# Altium PCB FC2.PcbDoc (part 1 of 2)
Units mm, origin at the board's own origin, x right, y up, seen from the top; angles counter-clockwise.
Board outline 53 x 51 mm, 4 copper layers (Top Layer, GND, PWR, Bottom Layer), stack 0.603 mm thick; 103 components, 69 nets, 505 pads, 103 vias.
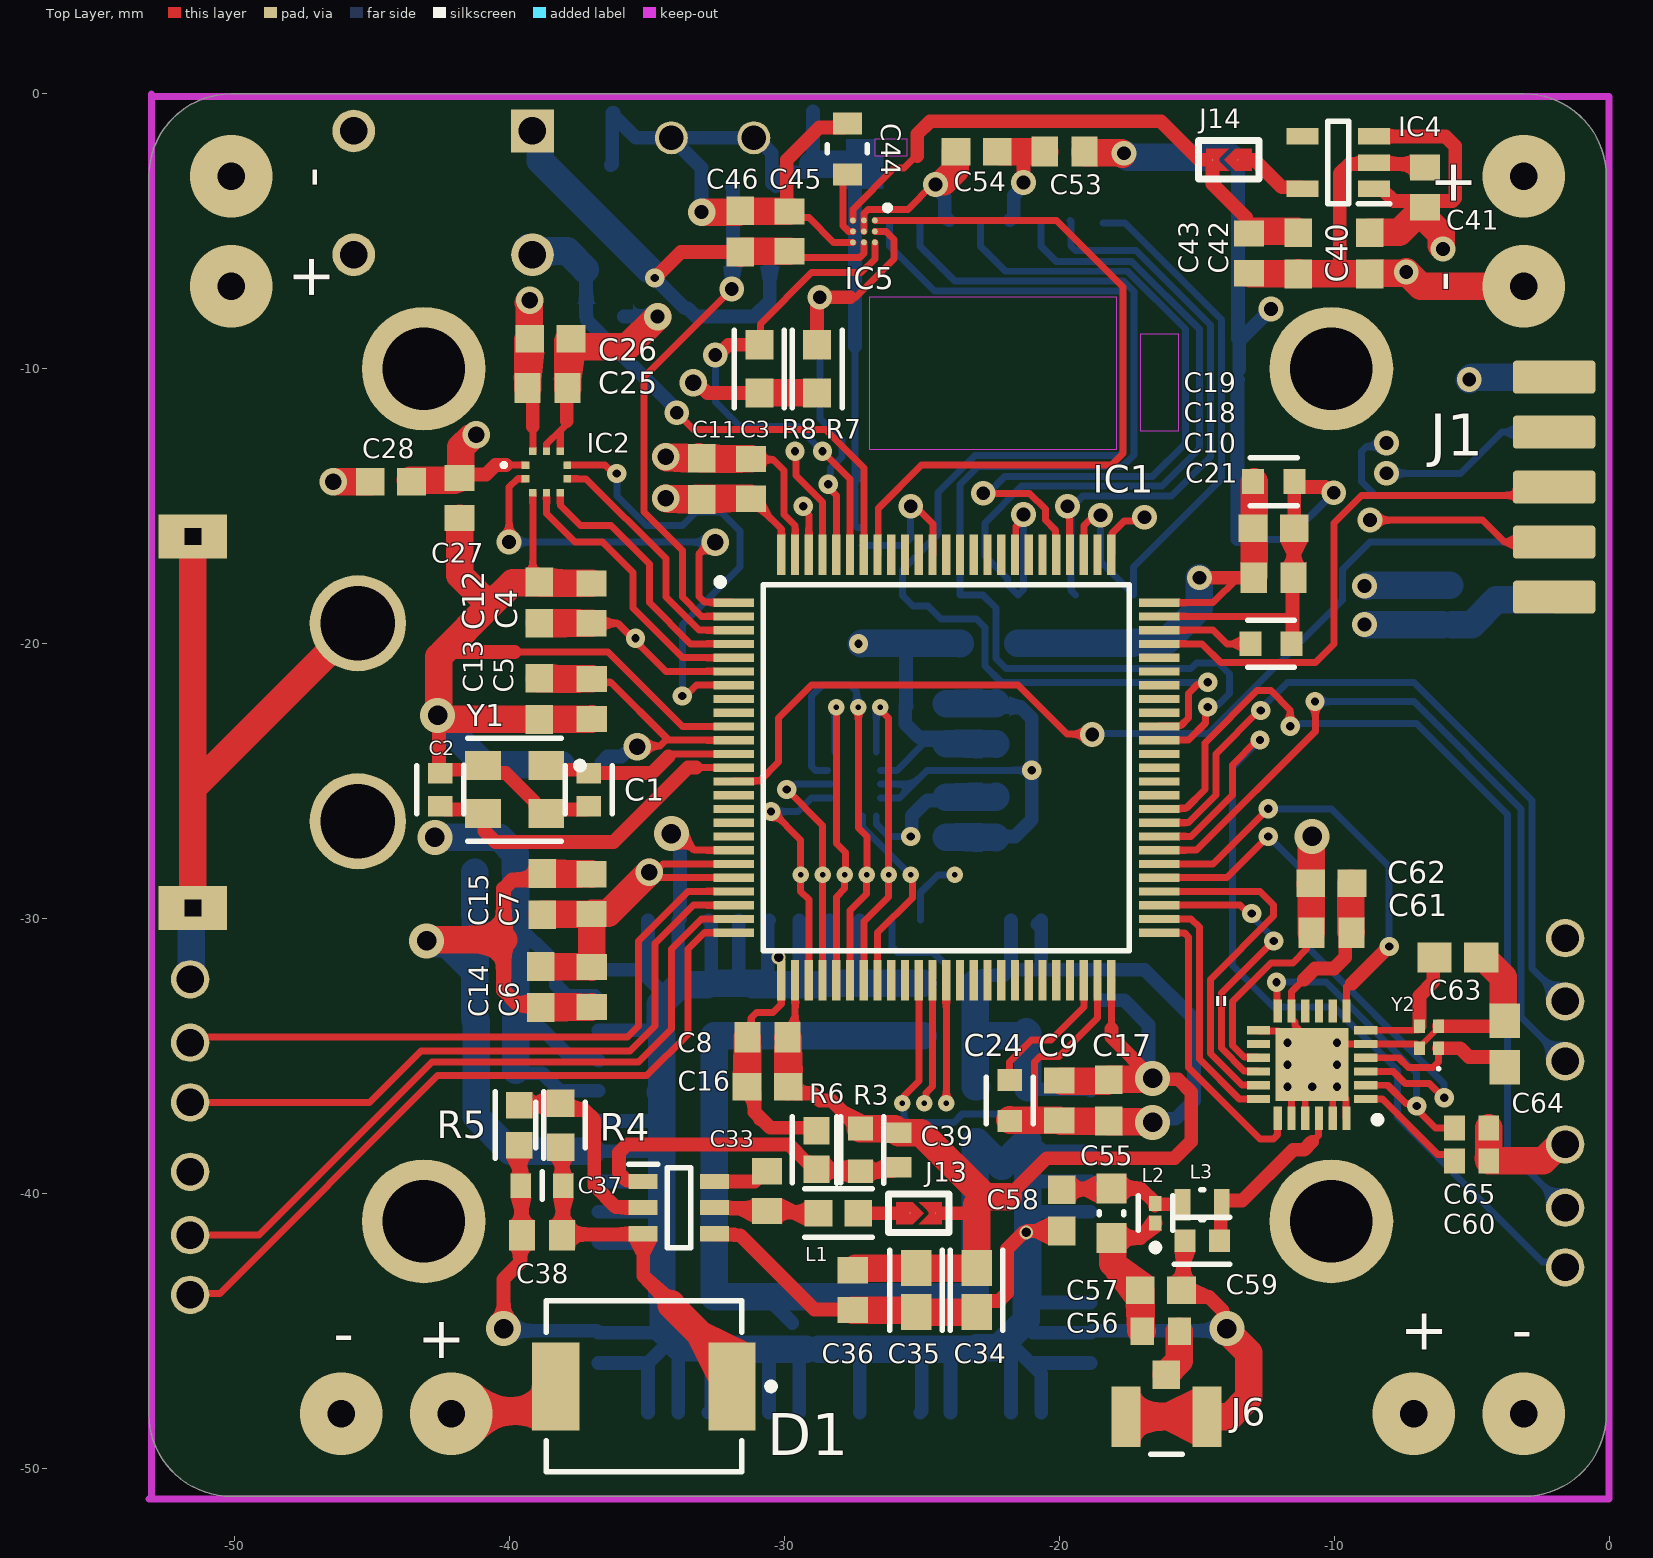
[diagram p0: Top Layer view]
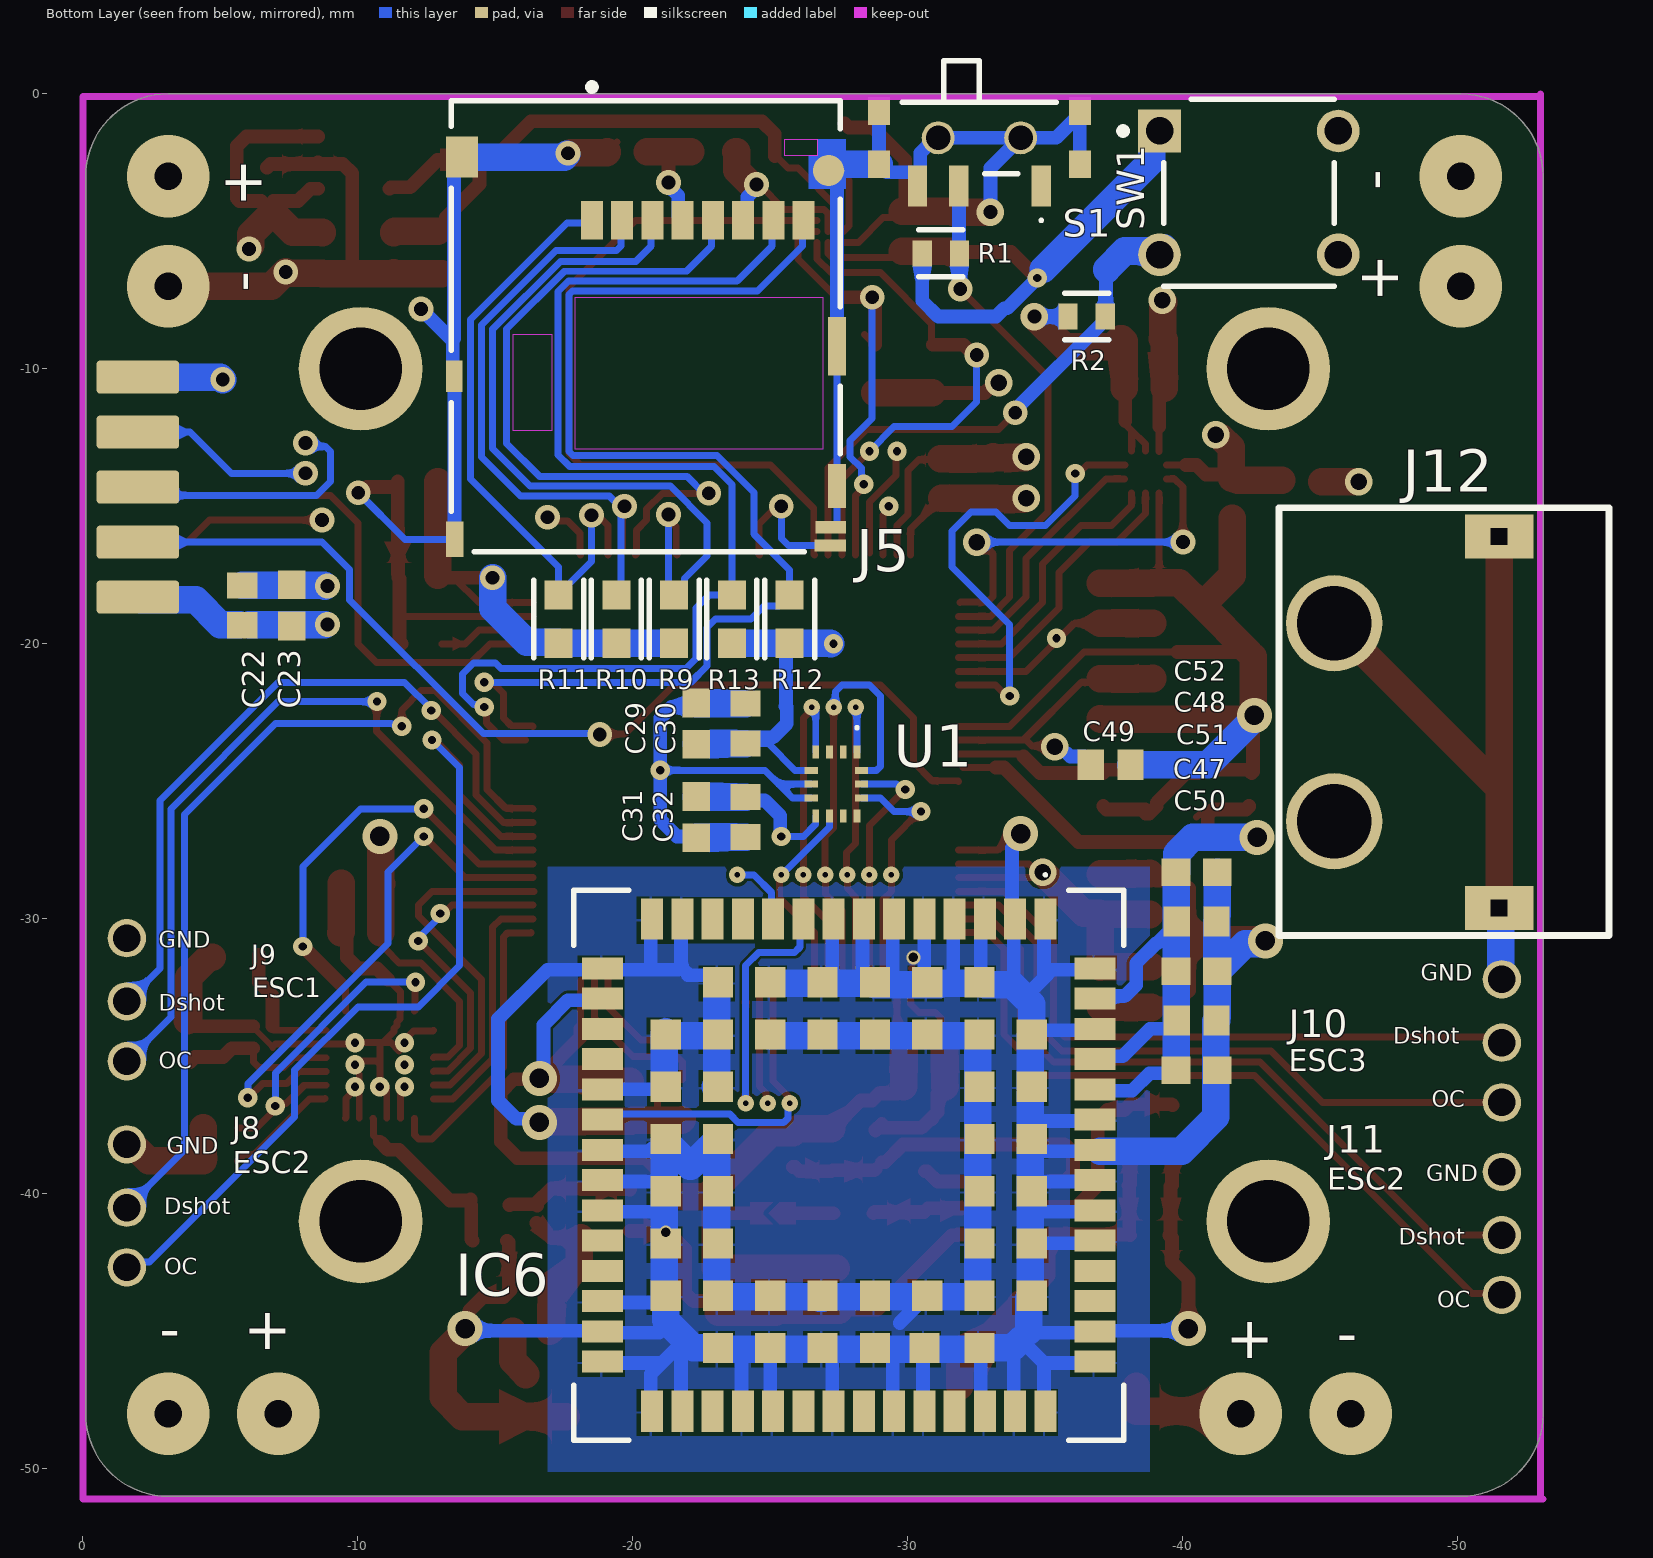
[diagram p1: Bottom Layer view, seen from below]
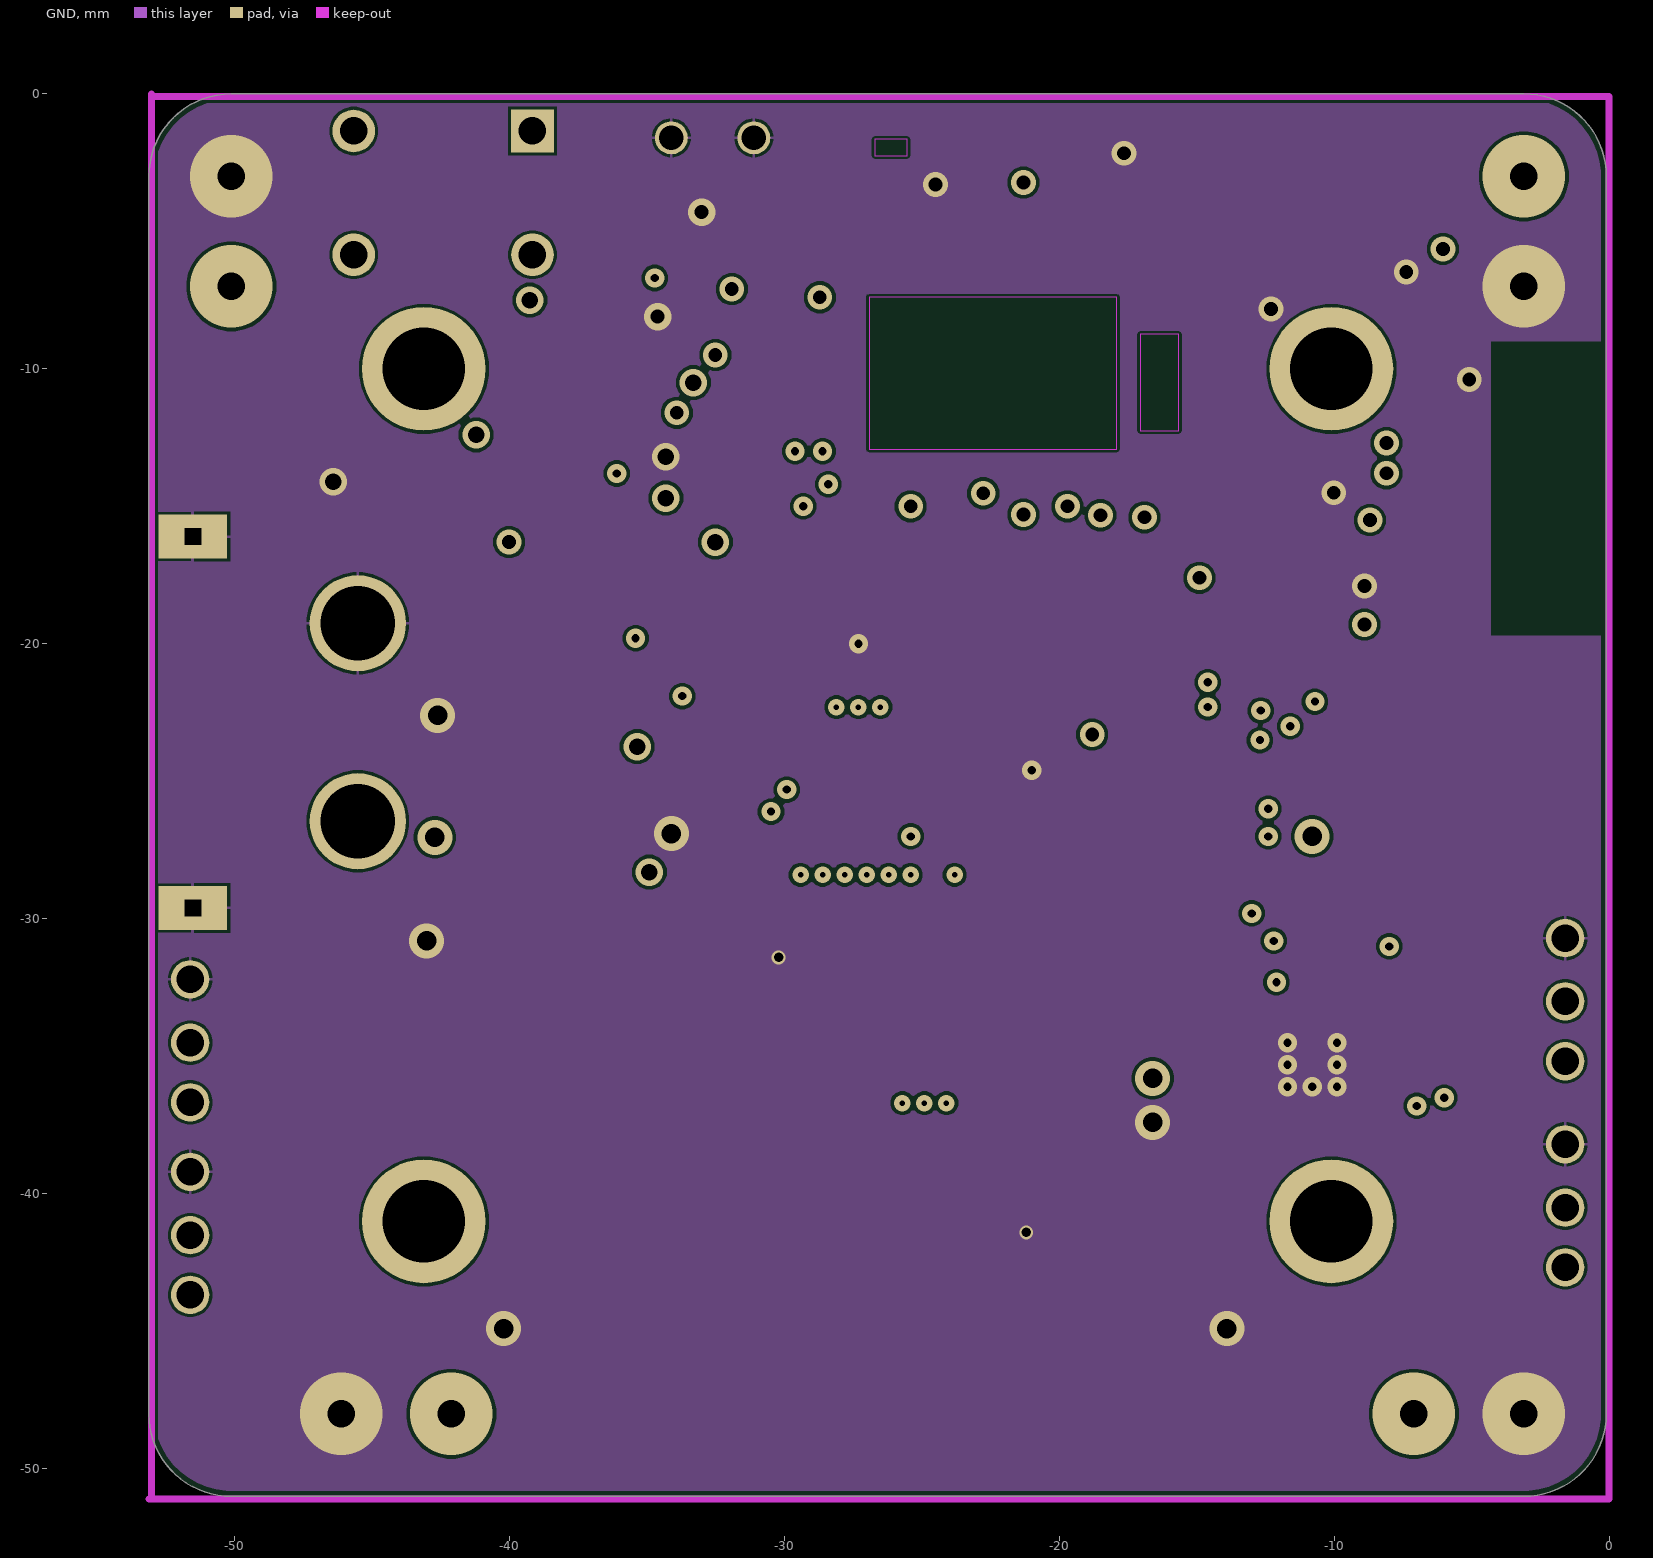
[diagram p2: GND]
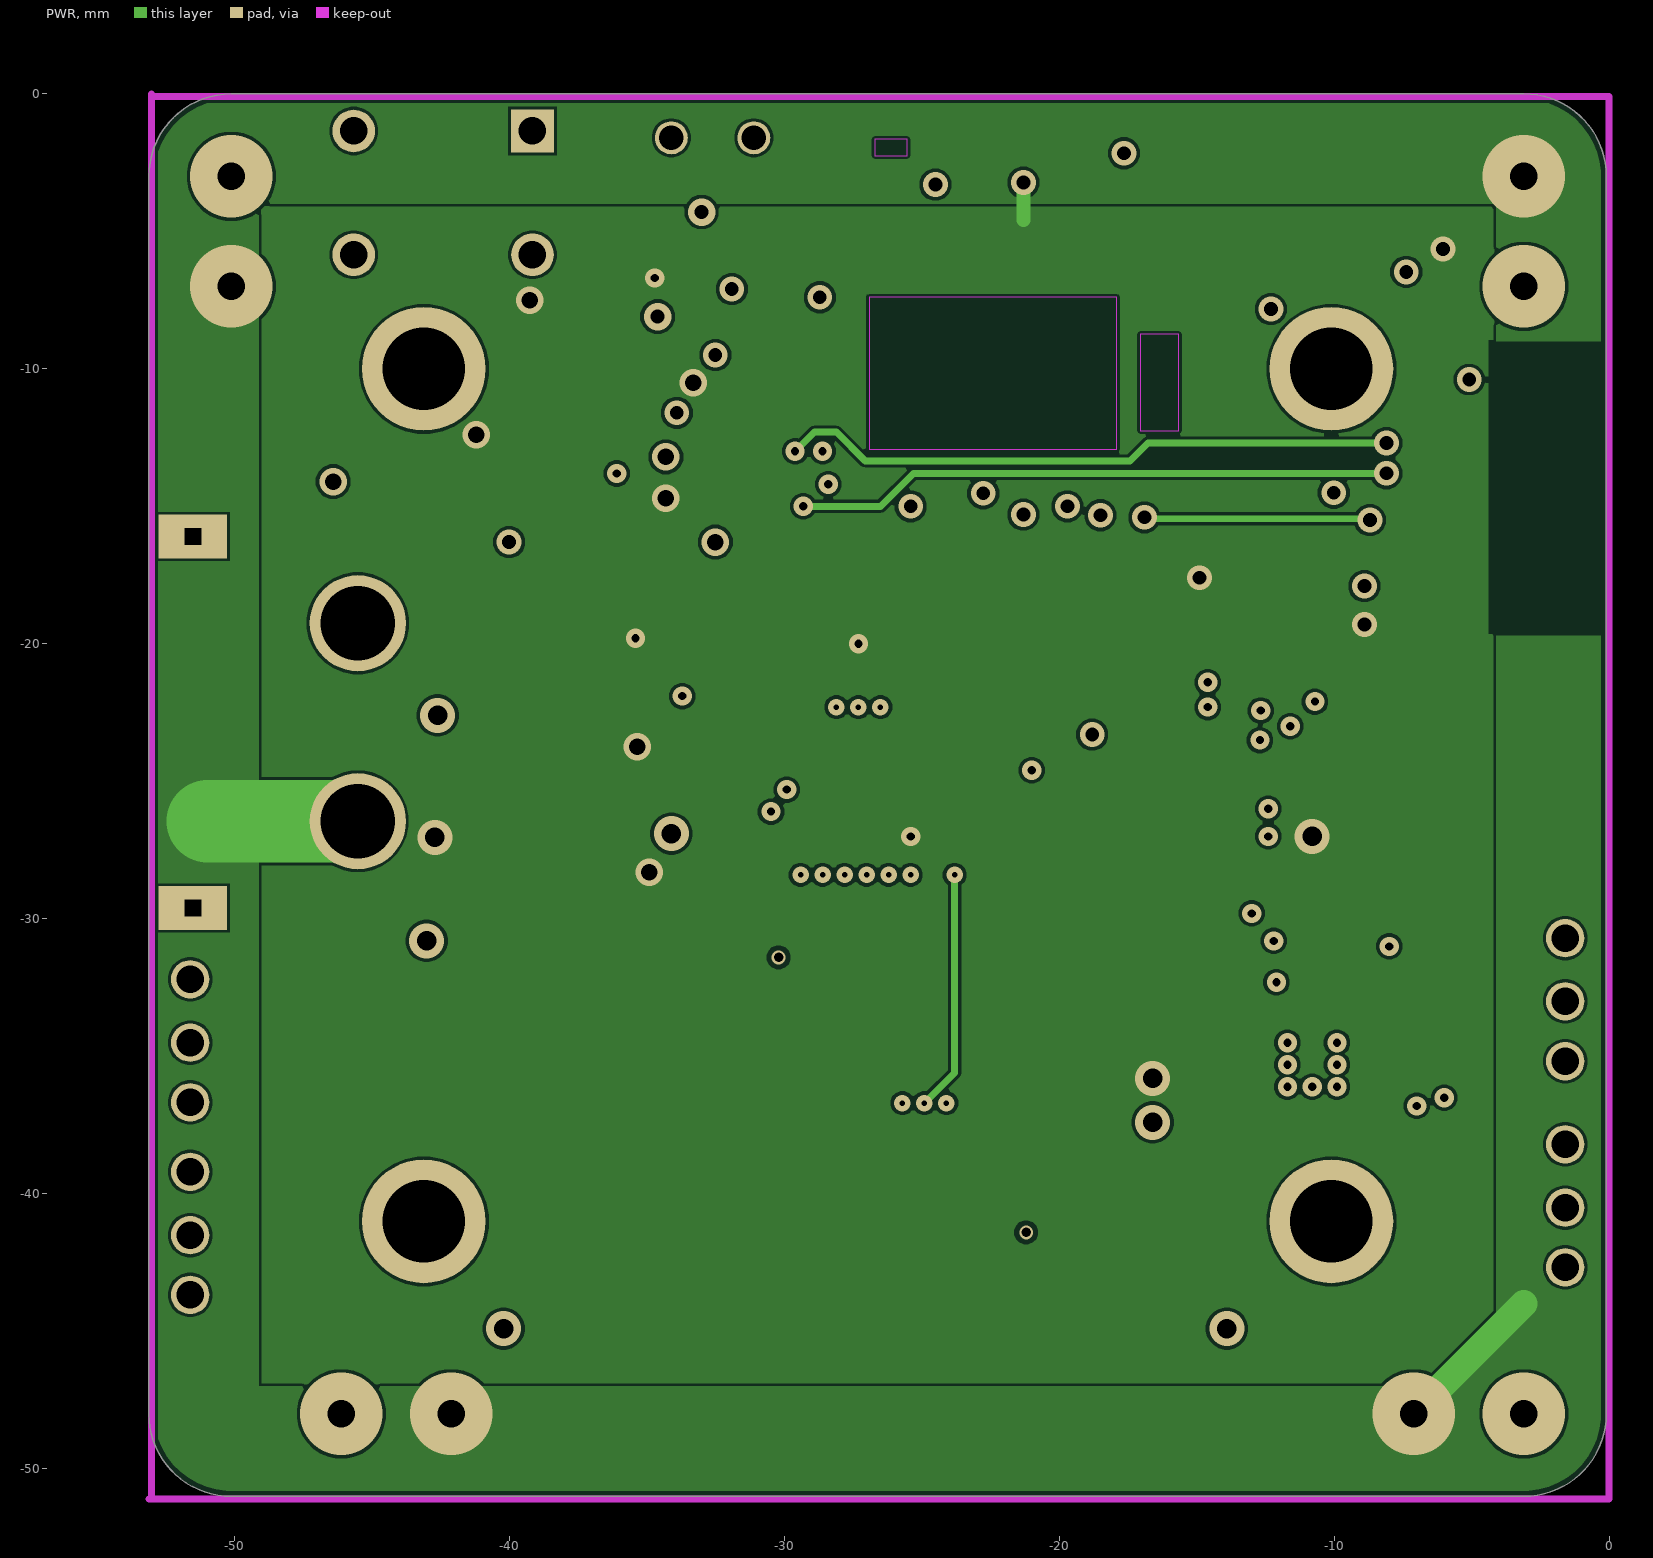
[diagram p3: PWR]

## Layer stack, top to bottom
Top Solder: solder mask 0.0102, Solder Resist, Dk 3.5
Top Layer: signal copper 0.0356
Dielectric 2: prepreg 0.0711, PP-006, Dk 4.1
GND: signal copper 0.035
Dielectric 1: dielectric 0.32, FR-4, Dk 4.8
PWR: signal copper 0.035
Dielectric 3: prepreg 0.0711, PP-006, Dk 4.1
Bottom Layer: signal copper 0.0356
Bottom Solder: solder mask 0.0102, Solder Resist, Dk 3.5

## Board outline
-53.1,-48 -53.1,-3 cw(c-50.1,-3) -50.1,0 -3.1,0 cw(c-3.1,-3) -0.1,-3 -0.1,-48.004 -0.1,-48 cw(c-3.1,-48) -3.1,-51 -50.1,-51 cw(c-50.1,-48)

## Design rules (kind name [scope] priority, off if disabled: settings)
BoardOutlineClearance [All] p1: gap=0.2 ignorepadtopadclearanceinfootprint=FALSE
Clearance [All] p1: gap=0.102 ignorepadtopadclearanceinfootprint=TRUE except(0.127: Arc-Via Track-Via SMDPad-Via THPad-Via Via-Via Via-Fill Via-Poly Via-Region Via-Text; 0.254: Arc-Hole Track-Hole SMDPad-Hole THPad-Hole Via-Hole Fill-Hole Poly-Hole Region-Hole Text-Hole)
ComponentClearance [All] p1: gap=0.102 collisioncheckmode=3 verticalgap=0.102 showdistances=TRUE
DiffPairsRouting [All] p1: maxlimit=0.127 minlimit=0.102 mostfreqgap=0.127 toplayer_minwidth=0.102 toplayer_maxwidth=1816.048 toplayer_prefwidth=0.321 midlayer1_mingap=0.127 midlayer1_minwidth=0.238 midlayer1_maxwidth=0.238 midlayer1_prefwidth=0.238 midlayer2_mingap=0.127 midlayer2_minwidth=0.238 midlayer2_maxwidth=0.238 midlayer2_prefwidth=0.238 bottomlayer_minwidth=0.102 bottomlayer_maxwidth=1816.048 bottomlayer_prefwidth=0.321 maxuncoupledlength=12.7
Height [All] p1: minheight=0 maxheight=1816.048 prefheight=12.7
HoleSize [All] p1: absolutevalues=TRUE maxlimit=6.3 minlimit=0.2 maxpercent=80.000 minpercent=20.000
HoleToHoleClearance [All] p1: gap=0.254 allowstackedmicrovias=FALSE
MinimumAnnularRing [All] p1: minimumring=0.151
MinimumSolderMaskSliver [All] p1: minsoldermaskwidth=0.09
PlaneClearance [All] p1: clearance=0.102
PlaneConnect PlaneConnectPowerPads [InPadClass('PowerPads')] p1: planeconnectstyle=Direct reliefexpansion=0.508 reliefentries=4 reliefconductorwidth=0.254 reliefairgap=0.254
PlaneConnect [All] p2: pad.planeconnectstyle=Relief pad.reliefexpansion=0.3 pad.reliefentries=4 pad.reliefconductorwidth=0.102 pad.reliefairgap=0.102 via.planeconnectstyle=Direct via.reliefexpansion=0.3 via.reliefentries=4 via.reliefconductorwidth=0.127 via.reliefairgap=0.127
PolygonConnect PolygonConnectPowerPads [All vs (InPadClass('PowerPads'))] p1: connectstyle=Direct reliefconductorwidth=0.254 reliefentries=4 polygonreliefangle="90 Angle" airgapwidth=0.254
PolygonConnect [All] p2: thpad.connectstyle=Relief thpad.reliefconductorwidth=0.102 thpad.reliefentries=4 thpad.polygonreliefangle="90 Angle" thpad.airgapwidth=0.102 smdpad.connectstyle=Relief smdpad.reliefconductorwidth=0.102 smdpad.reliefentries=4 smdpad.polygonreliefangle="90 Angle" smdpad.airgapwidth=0.102 via.connectstyle=Direct via.reliefconductorwidth=0.127 via.reliefentries=4 via.polygonreliefangle="90 Angle" via.airgapwidth=0.127
RoutingVias [All] p1: holewidth=0.2 width=0.45 viastyle="Through Hole" minholewidth=0.2 minwidth=0.45 maxholewidth=6.3 maxwidth=6.55
SilkToSilkClearance [All] p1: silktosilkclearance=0.127
SilkToSolderMaskClearance [IsPad] p1: minsilkscreentomaskgap=0.127 clearancetoexposedcopper=TRUE
SolderMaskExpansion [All] p1: expansion=0.051 istentingtop=FALSE
SupplyNets "Schematic Supply Nets_3" [InNet('BAT-')] p1: voltage=0.000
SupplyNets "Schematic Supply Nets_2" [InNet('+1.8')] p2: voltage=0.000
SupplyNets "Schematic Supply Nets_1" [InNet('VCC')] p3: voltage=0.000
SupplyNets "Schematic Supply Nets" [InNet('+3.3')] p4: voltage=0.000
UnRoutedNet [All] p1: checkbadconnections=TRUE
Width Width_PWR [All] p1: maxlimit=3 minlimit=0.12 preferedwidth=0.254
Width Width_min [All] p2: maxlimit=0.12 minlimit=0.12 preferedwidth=0.12
Width [All] p3: maxlimit=0.254 minlimit=0.254 preferedwidth=0.254
19 further rules are at their usual default settings.

## Classes and differential pairs
component class U_uController: C1 C2 C3 C4 C5 C6 C7 C8 C9 C10 C11 C12 C13 C14 C15 C16 C17 C18 C19 C21 C22 C23 C24 IC1 J1 J8 J9 J10 J11 R1 R2 S1 SW1 Y1
component class U_Sensors: C25 C26 C27 C28 C29 C30 C31 C32 IC2 U1
component class U_Power: C33 C34 C35 C36 C37 C38 C39 C40 C41 C42 C43 D1 IC4 J12 J13 J14 L1 R3 R4 R5 R6
component class U_Controller: "\"" C55 C56 C57 C58 C59 C60 C61 C62 C63 C64 C65 J6 L2 L3 Y2
component class U_Autonoom: C44 C45 C46 C47 C48 C49 C50 C51 C52 C53 C54 IC6 J5 R7 R8 R9 R10 R11 R12 R13

## Components (designator, comment, footprint, x,y, rotation, side; value= is the part's Value field where it differs from the comment)
"\"" "SX1280IMLTRT" QFN50P400X400X100-25N-D -10.8,-35.3 r180 top (schematic designator IC7)
C1 "18pF" FP-C0603C-CF-MFG -37.1,-25.3 r270 top value="18 pF"
C2 "18pF" FP-C0603C-CF-MFG -42.5,-25.3 r90 top value="18 pF"
C3 "100nF" CAPC1608X92X38ML15T08 -31.2,-14 r270 top
C4 "100nF" CAPC1608X92X38ML15T08 -37,-18.525 r270 top
C5 "100nF" CAPC1608X92X38ML15T08 -37,-22 r90 top
C6 "100nF" CAPC1608X92X38ML15T08 -37,-32.475 r90 top
C7 "100nF" CAPC1608X92X38ML15T08 -37,-29.1 r270 top
C8 "100nF" CAPC1608X92X38ML15T08 -30.601,-34.3 r0 top
C9 "100nF" CAPC1608X92X38ML15T08 -20,-36.601 r90 top
C10 "100nF" CAPC1608X92X38ML15T08 -12.199,-17.6 r180 top
C11 "1uF" CAPC1608X90X35NL15T15 -33,-14 r270 top
C12 "1uF" CAPC1608X90X35NL15T15 -38.9,-18.5 r270 top
C13 "1uF" CAPC1608X90X35NL15T15 -38.9,-22 r90 top
C14 "1uF" CAPC1608X90X35NL15T15 -38.85,-32.475 r90 top
C15 "1uF" CAPC1608X90X35NL15T15 -38.8,-29.1 r270 top
C16 "1uF" CAPC1608X90X35NL15T15 -30.6,-36.1 r0 top
C17 "1uF" CAPC1608X90X35NL15T15 -18.2,-36.6 r90 top
C18 "1uF" CAPC1608X90X35NL15T15 -12.2,-15.8 r180 top
C19 "4.7uF" FP-CC0603-DC-MFG -12.2,-14.1 r0 top
C21 "2.2uF" FP-CC0603-DA-MFG -12.3,-20 r0 top value="2.2 uF"
C22 "100nF" CAPC1608X92X38ML15T08 -5.8,-18.6 r270 bottom
C23 "1uF" CAPC1608X90X35NL15T15 -7.6,-18.6 r270 bottom
C24 "2.2uF" FP-CC0603-DA-MFG -21.8,-36.6 r270 top value="2.2 uF"
C25 "100nF" CAPC1608X92X38ML15T08 -38.6,-10.7 r180 top
C26 "1uF" CAPC1608X90X35NL15T15 -38.5,-8.9 r180 top
C27 "100nF" CAPC1608X92X38ML15T08 -41.8,-14.7 r90 top
C28 "1uF" CAPC1608X90X35NL15T15 -44.3,-14.1 r0 top
C29 "100nF" CAPC1608X92X38ML15T08 -24.1,-22.9 r270 bottom
C30 "1uF" CAPC1608X90X35NL15T15 -22.3,-22.9 r270 bottom
C31 "1uF" CAPC1608X90X35NL15T15 -22.3,-26.3 r90 bottom
C32 "100nF" CAPC1608X92X38ML15T08 -24.1,-26.3 r90 bottom
C33 "100nF" CAPC1608X92X38ML15T08 -30.625,-39.9 r90 top
C34 "22uF" FP-GRM188-0_2-IPC_A -23,-43.499 r270 top
C35 "22uF" FP-GRM188-0_2-IPC_A -25.2,-43.499 r270 top
C36 "100nF" CAPC1608X92X38ML15T08 -27.5,-43.5 r90 top
C37 "10uF" FP-ZRB18AR61E106ME01L-MFG -38.8,-39.7 r180 top
C38 "100nF" CAPC1608X92X38ML15T08 -38.8,-41.5 r0 top
C39 "100p" CAPC1608X92X38LL15T08 -25.825,-38.4 r90 top
C40 "1uF" CAPC1608X90X35NL15T15 -8.7,-5.8 r90 top
C41 "100nF" CAPC1608X92X38ML15T08 -6.7,-3.4 r90 top
C42 "1uF" CAPC1608X90X35NL15T15 -11.3,-5.8 r90 top
C43 "100nF" CAPC1608X92X38ML15T08 -13.1,-5.8 r270 top
C44 "2.2uF" FP-CGB4B-MFG -27.7,-2 r90 top
C45 "100nF" CAPC1608X92X38ML15T08 -29.8,-5 r270 top
C46 "1uF" CAPC1608X90X35NL15T15 -31.6,-5 r270 top
C47 "100nF" CAPC1608X92X38ML15T08 -40.5,-33.699 r0 bottom
C48 "100nF" CAPC1608X92X38ML15T08 -40.5,-30.099 r0 bottom
C49 "100nF" CAPC1608X92X38ML15T08 -37.375,-24.4 r0 bottom
C50 "1uF" CAPC1608X90X35NL15T15 -40.5,-35.499 r0 bottom
C51 "1uF" CAPC1608X90X35NL15T15 -40.5,-31.899 r0 bottom
C52 "1uF" CAPC1608X90X35NL15T15 -40.5,-28.299 r0 bottom
C53 "100nF" CAPC1608X92X38ML15T08 -19.8,-2.1 r180 top
C54 "1uF" CAPC1608X90X35NL15T15 -23,-2.1 r0 top
C55 "0.5pF" CAPC0603(1608)100_M -18.1,-40.7 r90 top
C56 "100pF" CAPC1608X92X38NL15T08 -16.3,-45 r180 top
C57 "1.2pF" CAPC1608X90X35NL15T15 -16.3,-43.5 r180 top
C58 "1.2pF" CAPC1608X90X35NL15T15 -19.9,-40.6 r90 top
C59 "0.8pF" FP-GCM188-0_1-IPC_C -14.8,-41.7 r180 top
C60 "10nF" CAPC1608X92X38LL15T08 -5,-38.8 r180 top
C61 "100nF" CAPC1608X92X38ML15T08 -10.1,-30.5 r180 top
C62 "1uF" CAPC1608X90X35NL15T15 -10.1,-28.7 r180 top
C63 "6pF" CAPC1608X90X35ML15T15 -5.5,-31.4 r180 top
C64 "6pF" CAPC1608X90X35ML15T15 -3.8,-34.55 r270 top
C65 "10nF" CAPC1608X92X38LL15T08 -5,-37.6 r180 top
D1 "SS34-E3/9AT" FP-SMC-MFG -35.1,-47 r180 top
IC1 "STM32F745VGT6" QFP50P1600X1600X160-100N -24.1,-24.5 r0 top
IC2 "BMP384" BMP384 -38.642,-13.75 r90 top
IC3 "AP63201WU-7" SOT95P280X100-6N -33.825,-40.5 r0 top
IC4 "AP2112K-1.8TRG1" SOT95P285X140-5N -9.85,-2.5 r180 top
IC5 "BMM350" BGA9C40P3X3_128X128X54 -27.1,-5 r270 top
IC6 "DAN-F10N-00B" DANF10N00B -27.85,-38.95 r0 bottom
J1 "STLink Connector" PCBComponent_1 -2,-14.3 r270 top
J5 "2201778-1" FP-2201778-1-MFG -22.45,-9.55 r0 bottom
J6 "U.FL-R-SMT(10)" FP-U_FL-R-SMT_10-MFG -16.1,-48.1 r0 top
J8 "Dshot, overcurrent, GND" FC-ESC_Connector -1.55,-40.5 r90 bottom
J9 "Dshot, overcurrent, GND" FC-ESC_Connector -1.55,-33 r90 bottom
J10 "Dshot, overcurrent, GND" FC-ESC_Connector -51.55,-34.5 r90 bottom
J11 "Dshot, overcurrent, GND" FC-ESC_Connector -51.55,-41.5 r90 bottom
J12 "XT60PW-M" "XT60 juist" -45.5,-22.85 r270 bottom
J13 "0603 jumper" "0603 jumper" -25.1,-40.7 r0 top
J14 "0603 jumper" "0603 jumper" -13.825,-2.4 r180 top
L1 "6.8µ" FP-MLZ1608-IPC_B -28.025,-40.7 r0 top
L2 "2.5nH" FP-LQP03TG_02-IPC_A -16.5,-40.7 r90 top
L3 "3nH" FP-LQW18AN_80-MFG -14.8,-40.4 r0 top
R1 "10k" FP-MCT0603-MFG -31.2,-5.8 r0 bottom
R2 "10k" FP-MCT0603-MFG -36.5,-8.1 r180 bottom
R3 "182k" FP-AC0603-IPC_B -27.225,-38.4 r90 top
R4 "28.7k" FP-TFCR0603-MFG -38.125,-37.5 r270 top
R5 "2.8k" FP-CRCW0603-HPe3-IPC_B -39.625,-37.5 r90 top
R6 "62k" FP-RMCF0603-IPC_B -28.825,-38.4 r270 top
R7 "4.7k" FP-AC0603-IPC_A -28.8,-10 r270 top
R8 "4.7k" FP-AC0603-IPC_A -30.9,-10 r270 top
R9 "4.7k" FP-AC0603-IPC_A -21.5,-19.1 r270 bottom
R10 "4.7k" FP-AC0603-IPC_A -19.4,-19.1 r270 bottom
R11 "4.7k" FP-AC0603-IPC_A -17.3,-19.1 r270 bottom
R12 "4.7k" FP-AC0603-IPC_A -25.7,-19.1 r270 bottom
R13 "4.7k" FP-AC0603-IPC_A -23.6,-19.1 r90 bottom
S1 "PCM12SMTBR" PCM12SMTBR -32.6,-1.6 r0 bottom
SW1 "B3W-1022" FP-B3W-1022-MFG -42.4,-3.6 r0 bottom
U1 "BMI330" BMI330 -27.4,-25.1 r270 bottom
Y1 "16MHz" FP-ABM8-MFG -39.799,-25.3 r180 top
Y2 "ABM13W-52.0000MHZ-5-B2G-T5" ABM13W -6.55,-34.3 r90 top

## Footprints (in the part's own frame and the unit in brackets; to place one, negate y for a bottom-side part, rotate by r counter-clockwise, add the part's x,y. Pads: shape width x height; smd on the part's side, far side on the other; paste and mask are expansions set on the pad)
"0603 jumper" [mil]
  round 1 smd: 1(-12.8,0) 2(23.62,0)
  Top Layer region: -32.48,-15.75 -32.48,15.75 -8.86,15.75 6.89,0 -8.86,-15.75
  Top Layer region: 15.75,0 0,-15.75 32.48,-15.75 32.48,15.75 0,15.75 8.86,6.89
  silkscreen extent -43,-28 43,28
ABM13W [mm]
  rect 0.5x0.4 smd: 1(-0.4,-0.35) 2(0.4,-0.35) 3(0.4,0.35) 4(-0.4,0.35)
  silkscreen extent -1.2,-0.4 -1.1,-0.3, body extent -0.61,-0.51 0.61,0.51, height 0.43
BGA9C40P3X3_128X128X54 [mm]
  round 0.215 smd: A1(-0.4,0.4) A2(0,0.4) A3(0.4,0.4) B1(-0.4,0) B2(0,0) B3(0.4,0) C1(-0.4,-0.4) C2(0,-0.4) C3(0.4,-0.4)
  silkscreen extent -0.96,0.76 -0.76,0.96, body extent -0.64,-0.64 0.64,0.64, height 0.5
BMI330 [mm]
  rect 0.475x0.25 smd: 1(-1.163,0.75) 2(-1.163,0.25) 3(-1.163,-0.25) 4(-1.163,-0.75) 8(1.163,-0.75) 9(1.163,-0.25) 10(1.163,0.25) 11(1.163,0.75)
  rect 0.25x0.475 smd: 5(-0.5,-0.913) 6(0,-0.913) 7(0.5,-0.913) 12(0.5,0.913) 13(0,0.913) 14(-0.5,0.913)
  silkscreen extent -2.1,0.7 -2,0.8, body extent -1.5,-1.25 1.5,1.25, height 0.84
BMP384 [mm]
  rect 0.27x0.285 smd: 1(0.25,0.758) 2(-0.25,0.758) 6(-0.25,-0.758) 7(0.25,-0.758)
  rect 0.285x0.27 smd: 3(-0.757,0.5) 4(-0.757,0) 5(-0.757,-0.5) 8(0.757,-0.5) 9(0.757,0) 10(0.757,0.5)
  silkscreen extent 0.2,1.5 0.3,1.6, body extent -1,-1 1,1, height 1
CAPC0603(1608)100_M [mm] "Chip Capacitor, Body 1.6x0.8mm, Height 1.0mm, IPC Low Density"
  rect 1.1x1.1 smd: 1(-0.9,0) 2(0.9,0)
  silkscreen extent -0.05,-0.45 0.05,0.45, body extent -0.87,-0.47 0.88,0.48, height 1
CAPC1608X90X35ML15T15 [mm] "Chip Capacitor, 2-Leads, Body 1.60x0.81mm, IPC Low Density"
  rect 1.25x1.1 smd: 1(-0.85,0) 2(0.85,0)
  body extent -0.88,-0.48 0.87,0.48, height 0.9
CAPC1608X90X35NL15T15 [mm] "Chip Capacitor, 2-Leads, Body 1.60x0.81mm, IPC Medium Density"
  rect 1.05x1 smd: 1(-0.75,0) 2(0.75,0)
  body extent -0.88,-0.48 0.87,0.48, height 0.9
CAPC1608X92X38LL15T08 [mm] "Chip Capacitor, 2-Leads, Body 1.60x0.80mm, IPC High Density"
  rect 0.75x0.9 smd: 1(-0.625,0) 2(0.625,0)
  body extent -0.87,-0.48 0.87,0.48, height 0.92
CAPC1608X92X38ML15T08 [mm] "Chip Capacitor, 2-Leads, Body 1.60x0.80mm, IPC Low Density"
  rect 0.95x1.1 smd: 1(-0.725,0) 2(0.725,0)
  body extent -0.87,-0.48 0.87,0.47, height 0.92
CAPC1608X92X38NL15T08 [mm] "Chip Capacitor, 2-Leads, Body 1.60x0.80mm, IPC Medium Density"
  rect 0.85x1 smd: 1(-0.675,0) 2(0.675,0)
  body extent -0.87,-0.48 0.87,0.47, height 0.92
DANF10N00B [mm]
  rect 0.8x1.5 smd: 1(-7.15,-8.95) 2(-6.05,-8.95) 3(-4.95,-8.95) 4(-3.85,-8.95) 5(-2.75,-8.95) 6(-1.65,-8.95) 7(-0.55,-8.95) 8(0.55,-8.95) 9(1.65,-8.95) 10(2.75,-8.95) 11(3.85,-8.95) 12(4.95,-8.95) 13(6.05,-8.95) 14(7.15,-8.95) 29(7.15,8.95) 30(6.05,8.95) 31(4.95,8.95) 32(3.85,8.95) 33(2.75,8.95) 34(1.65,8.95) 35(0.55,8.95) 36(-0.55,8.95) 37(-1.65,8.95) 38(-2.75,8.95) 39(-3.85,8.95) 40(-4.95,8.95) 41(-6.05,8.95) 42(-7.15,8.95)
  rect 1.5x0.8 smd: 15(8.95,-7.15) 16(8.95,-6.05) 17(8.95,-4.95) 18(8.95,-3.85) 19(8.95,-2.75) 20(8.95,-1.65) 21(8.95,-0.55) 22(8.95,0.55) 23(8.95,1.65) 24(8.95,2.75) 25(8.95,3.85) 26(8.95,4.95) 27(8.95,6.05) 28(8.95,7.15) 43(-8.95,7.15) 44(-8.95,6.05) 45(-8.95,4.95) 46(-8.95,3.85) 47(-8.95,2.75) 48(-8.95,1.65) 49(-8.95,0.55) 50(-8.95,-0.55) 51(-8.95,-1.65) 52(-8.95,-2.75) 53(-8.95,-3.85) 54(-8.95,-4.95) 55(-8.95,-6.05) 56(-8.95,-7.15)
  rect 1.1x1.1 smd: 57(-4.75,-6.65) 58(-2.85,-6.65) 59(-0.95,-6.65) 60(0.95,-6.65) 61(2.85,-6.65) 62(4.75,-6.65) 63(6.65,-4.75) 64(6.65,-2.85) 65(6.65,-0.95) 66(6.65,0.95) 67(6.65,2.85) 68(6.65,4.75) 69(4.75,6.65) 70(2.85,6.65) 71(0.95,6.65) 72(-0.95,6.65) 73(-2.75,6.65) 74(-4.75,6.65) 75(-6.65,4.75) 76(-6.65,2.85) 77(-6.65,0.95) 78(-6.65,-0.95) 79(-6.65,-2.85) 80(-6.65,-4.75) 81(-4.75,-4.75) 82(-2.85,-4.75) 83(-0.95,-4.75) 84(0.95,-4.75) 85(2.85,-4.75) 86(4.75,-4.75) 87(4.75,-2.85) 88(4.75,-0.95) 89(4.75,0.95) 90(4.75,2.85) 91(4.75,4.75) 92(2.85,4.75) 93(0.95,4.75) 94(-0.95,4.75) 95(-2.85,4.75) 96(-4.75,4.75) 97(-4.75,2.85) 98(-4.75,0.95) 99(-4.75,-0.95) 100(-4.75,-2.85)
  silkscreen extent -10,-10.6 10,10, body extent -9.9,-9.9 9.9,9.9, height 11.05
FC-ESC_Connector [mm]
  round 1.4 hole 1: 1(-2.175,-0.05) 2(0,-0.05) 3(2.3,-0.05)
FP-2201778-1-MFG [mm]
  rect 0.8x1.4 smd paste+0 mask+0: 1(3.94,-4.95) 2(2.84,-4.95) 3(1.74,-4.95) 4(0.64,-4.95) 5(-0.46,-4.95) 6(-1.56,-4.95) 7(-2.66,-4.95) 8(-3.76,-4.95)
  rect 1.15x0.45 smd paste+0 mask+0: 9(-4.725,6.875)
  rect 1.1x0.45 smd paste+0 mask+0: 10(-4.75,6.215)
  round 1.139 smd paste+0 mask+0: 11(-4.667,-6.761)
  rect 0.65x2.14 smd paste+0 mask+0: 12(-4.975,-0.37)
  rect 0.65x1.6 smd paste+0 mask+0: 13(-4.975,4.71)
  rect 0.65x1.3 smd paste+0 mask+0: 14(8.925,6.65)
  rect 0.6x1.15 smd paste+0 mask+0: 15(8.95,0.725)
  rect 1.16x1.5 smd paste+0 mask+0: 16(8.67,-7.25)
  Top Layer region: -5.3,-6.1 -3.95,-6.1 -3.95,-7.3 -4.25,-7.3 -4.25,-7.9 -5.3,-7.9
  Keep-Out Layer region: -4.46,3.37 4.54,3.37 4.54,-2.16 -4.46,-2.16
  Keep-Out Layer region: 5.4,2.7 6.8,2.7 6.8,-0.8 5.4,-0.8
  Keep-Out Layer region: -4.25,-7.3 -3.07,-7.3 -3.07,-7.9 -4.25,-7.9
  silkscreen extent -5.1,-9.92 9.05,7.1, body extent -5.08,-9.2 8.95,7, height 1.8
FP-ABM8-MFG [mm]
  rect 1.3x1.05 smd paste+0 mask+0: 1(-1.15,-0.875) 2(1.15,-0.875) 3(1.15,0.875) 4(-1.15,0.875)
  silkscreen extent -2.5,-1.88 1.7,1.88, body extent -1.9,-1.5 1.9,1.5, height 0.25
FP-AC0603-IPC_A [mm]
  rect 1.059x1.012 smd paste+0 mask+0: 1(-0.877,0) 2(0.877,0)
  silkscreen extent -1.41,-0.91 1.41,0.91, body extent -1.91,-1.01 1.91,1.01, height 0.25
FP-AC0603-IPC_B [mm]
  rect 0.859x0.912 smd paste+0 mask+0: 1(-0.777,0) 2(0.777,0)
  silkscreen extent -1.21,-0.86 1.21,0.86, body extent -1.46,-0.71 1.46,0.71, height 0.25
FP-B3W-1022-MFG [mm]
  rect 1.55x1.55 hole 1 paste-2539.97 mask+0: 1(3.25,-2.25)
  round 1.55 hole 1 paste-2539.97 mask+0: 2(-3.25,-2.25) 3(3.25,2.25) 4(-3.25,2.25)
  silkscreen extent -3.1,-3.4 4.7,3.4, body extent -3.85,-3.3 3.85,3.3, height 5.2
FP-C0603C-CF-MFG [mm]
  rect 0.75x0.9 smd paste+0 mask+0: 1(-0.6,0) 2(0.6,0)
  silkscreen extent -0.87,-0.85 0.88,0.85, body extent -1.2,-0.6 1.2,0.6, height 0.25
FP-CC0603-DA-MFG [mm]
  rect 0.8x0.9 smd paste+0 mask+0: 1(-0.75,0) 2(0.75,0)
  silkscreen extent -0.85,-0.85 0.85,0.85, body extent -1.35,-0.75 1.35,0.75, height 0.25
FP-CC0603-DC-MFG [mm]
  rect 0.8x0.9 smd paste+0 mask+0: 1(-0.75,0) 2(0.75,0)
  silkscreen extent -0.85,-0.87 0.85,0.87, body extent -1.43,-0.82 1.43,0.82, height 0.25
FP-CGB4B-MFG [mm]
  rect 0.8x1.05 smd paste+0 mask+0: 1(-0.925,0) 2(0.925,0)
  silkscreen extent -0.15,-0.72 0.15,0.72, body extent -1.43,-0.82 1.43,0.82, height 0.25
FP-CRCW0603-HPe3-IPC_B [mm]
  rect 0.958x0.962 smd paste+0 mask+0: 1(-0.727,0) 2(0.727,0)
  silkscreen extent -1.21,-0.88 1.21,0.88, body extent -1.46,-0.73 1.46,0.73, height 0.25
FP-GCM188-0_1-IPC_C [mm]
  rect 0.759x0.812 smd paste+0 mask+0: 1(-0.627,0) 2(0.627,0)
  silkscreen extent -1.01,-0.85 1.01,0.85, body extent -1.11,-0.55 1.11,0.55, height 0.25
FP-GRM188-0_2-IPC_A [mm]
  rect 1.305x1.106 smd paste+0 mask+0: 1(-0.801,0) 2(0.801,0)
  silkscreen extent -1.45,-0.95 1.45,0.95, body extent -1.95,-1.05 1.95,1.05, height 0.25
FP-LQP03TG_02-IPC_A [mm]
  rect 0.554x0.463 smd paste+0 mask+0: 1(-0.354,0) 2(0.354,0)
  silkscreen extent -1.37,-0.63 0.63,0.63, body extent -0.83,-0.43 0.83,0.43, height 0.25
FP-LQW18AN_80-MFG [mm]
  rect 0.57x1.15 smd paste+0 mask+0: 1(-0.715,0) 2(0.715,0)
  silkscreen extent -0.06,-0.55 0.06,0.55, body extent -1.1,-0.67 1.1,0.67, height 0.25
FP-MCT0603-MFG [mm]
  rect 0.7x0.95 smd paste+0 mask+0: 1(-0.675,0) 2(0.675,0)
  silkscreen extent -0.8,-0.85 0.8,0.85, body extent -0.77,-0.43 0.77,0.43, height 0.55
FP-MLZ1608-IPC_B [mm]
  rect 1.006x0.958 smd paste+0 mask+0: 1(-0.726,0) 2(0.726,0)
  silkscreen extent -1.23,-0.88 1.23,0.88, body extent -1.48,-0.73 1.48,0.73, height 0.25
FP-RMCF0603-IPC_B [mm]
  rect 1.006x0.958 smd paste+0 mask+0: 1(-0.701,0) 2(0.701,0)
  silkscreen extent -1.2,-0.88 1.2,0.88, body extent -1.45,-0.73 1.45,0.73, height 0.25
FP-SMC-MFG [mm]
  rect 1.72x3.2 smd paste+0 mask+0: 1(-3.205,0) 2(3.205,0)
  silkscreen extent -4.75,-3.11 3.55,3.11, body extent -4.17,-3.21 4.17,3.21, height 0.25
FP-TFCR0603-MFG [mm]
  rect 1x1 smd paste+0 mask+0: 1(-0.8,0) 2(0.8,0)
  silkscreen extent -0.82,-0.9 0.82,0.9, body extent -1.4,-0.6 1.4,0.6, height 0.25
FP-U_FL-R-SMT_10-MFG [mm]
  rect 1x1.05 smd paste-1000 mask+0: 1(0,1.525)
  rect 1.05x2.2 smd paste-1000 mask+0: 2(-1.475,0) 3(1.475,0)
  silkscreen extent -0.58,-1.38 0.58,-1.38, body extent -2.1,-1.48 2.1,2.15, height 0.25
FP-ZRB18AR61E106ME01L-MFG [mm]
  rect 0.75x0.9 smd paste+0 mask+0: 1(-0.775,0) 2(0.775,0)
  silkscreen extent 0,-0.5 0,0.5, body extent -1.25,-0.6 1.25,0.6, height 0.25
PCBComponent_1 [mm]
  rrect20% 1.2x3 smd paste+0 mask+0.1: 1(-4,0) 2(-2,0) 3(0,0) 4(2,0) 5(4,0)
  rrect20% 1.2x3 smd far side paste+0 mask+0.1: 6(-4,0) 7(-2,0) 8(0,0) 9(2,0) 10(4,0)
PCM12SMTBR [mm]
  rect 0.7x1.5 smd: 1(-2.25,1.75) 2(0.75,1.75) 3(2.25,1.75)
  round 1.2 hole 0.9 unplated: MH(-1.5,0) MH(1.5,0)
  rect 0.8x1 smd: MP(-3.65,-0.965) MP(-3.65,0.965) MP(3.65,-0.965) MP(3.65,0.965)
  silkscreen extent -2.8,-2.8 2.8,3.05, body extent -3.85,-2.83 3.85,2.17, height 1.43
QFN50P400X400X100-25N-D [mm]
  rect 0.85x0.3 smd: 1(-1.95,1.25) 2(-1.95,0.75) 3(-1.95,0.25) 4(-1.95,-0.25) 5(-1.95,-0.75) 6(-1.95,-1.25) 13(1.95,-1.25) 14(1.95,-0.75) 15(1.95,-0.25) 16(1.95,0.25) 17(1.95,0.75) 18(1.95,1.25)
  rect 0.3x0.85 smd: 7(-1.25,-1.95) 8(-0.75,-1.95) 9(-0.25,-1.95) 10(0.25,-1.95) 11(0.75,-1.95) 12(1.25,-1.95) 19(1.25,1.95) 20(0.75,1.95) 21(0.25,1.95) 22(-0.25,1.95) 23(-0.75,1.95) 24(-1.25,1.95)
  rect 2.65x2.65 smd: 25(0,0)
  silkscreen extent -2.5,1.88 -2.25,2.12, body extent -2.05,-2.05 2.05,2.05, height 1
QFP50P1600X1600X160-100N [mm]
  rect 1.475x0.3 smd: 1(-7.738,6) 2(-7.738,5.5) 3(-7.738,5) 4(-7.738,4.5) 5(-7.738,4) 6(-7.738,3.5) 7(-7.738,3) 8(-7.738,2.5) 9(-7.738,2) 10(-7.738,1.5) 11(-7.738,1) 12(-7.738,0.5) 13(-7.738,0) 14(-7.738,-0.5) 15(-7.738,-1) 16(-7.738,-1.5) 17(-7.738,-2) 18(-7.738,-2.5) 19(-7.738,-3) 20(-7.738,-3.5) 21(-7.738,-4) 22(-7.738,-4.5) 23(-7.738,-5) 24(-7.738,-5.5) 25(-7.738,-6) 51(7.738,-6) 52(7.738,-5.5) 53(7.738,-5) 54(7.738,-4.5) 55(7.738,-4) 56(7.738,-3.5) 57(7.738,-3) 58(7.738,-2.5) 59(7.738,-2) 60(7.738,-1.5) 61(7.738,-1) 62(7.738,-0.5) 63(7.738,0) 64(7.738,0.5) 65(7.738,1) 66(7.738,1.5) 67(7.738,2) 68(7.738,2.5) 69(7.738,3) 70(7.738,3.5) 71(7.738,4) 72(7.738,4.5) 73(7.738,5) 74(7.738,5.5) 75(7.738,6)
  rect 0.3x1.475 smd: 26(-6,-7.738) 27(-5.5,-7.738) 28(-5,-7.738) 29(-4.5,-7.738) 30(-4,-7.738) 31(-3.5,-7.738) 32(-3,-7.738) 33(-2.5,-7.738) 34(-2,-7.738) 35(-1.5,-7.738) 36(-1,-7.738) 37(-0.5,-7.738) 38(0,-7.738) 39(0.5,-7.738) 40(1,-7.738) 41(1.5,-7.738) 42(2,-7.738) 43(2.5,-7.738) 44(3,-7.738) 45(3.5,-7.738) 46(4,-7.738) 47(4.5,-7.738) 48(5,-7.738) 49(5.5,-7.738) 50(6,-7.738) 76(6,7.738) 77(5.5,7.738) 78(5,7.738) 79(4.5,7.738) 80(4,7.738) 81(3.5,7.738) 82(3,7.738) 83(2.5,7.738) 84(2,7.738) 85(1.5,7.738) 86(1,7.738) 87(0.5,7.738) 88(0,7.738) 89(-0.5,7.738) 90(-1,7.738) 91(-1.5,7.738) 92(-2,7.738) 93(-2.5,7.738) 94(-3,7.738) 95(-3.5,7.738) 96(-4,7.738) 97(-4.5,7.738) 98(-5,7.738) 99(-5.5,7.738) 100(-6,7.738)
  silkscreen extent -8.35,-6.65 6.65,6.87, body extent -8,-8 8,8, height 1.6
SOT95P280X100-6N [mm]
  rect 1.05x0.55 smd: 1(-1.3,0.95) 2(-1.3,0) 3(-1.3,-0.95) 4(1.3,-0.95) 5(1.3,0) 6(1.3,0.95)
  silkscreen extent -1.83,-1.45 0.43,1.58, body extent -1.4,-1.45 1.4,1.45, height 1
SOT95P285X140-5N [mm]
  rect 1.15x0.6 smd: 1(-1.3,0.95) 2(-1.3,0) 3(-1.3,-0.95) 4(1.3,-0.95) 5(1.3,0.95)
  silkscreen extent -1.88,-1.5 0.38,1.5, body extent -1.43,-1.5 1.43,1.5, height 1.4
"XT60 juist" [mm]
  round 3.5 hole 2.7: 1(3.6,0) 2(-3.6,0)
  rect 1.6x2.5 hole 0.6 square: MNT(-6.75,6) MNT(6.75,6)
  silkscreen extent -7.8,-2 7.75,10

## Part data
"\"": "Integrated Circuit", Manufacturer_Name=SEMTECH, Mouser Part Number=947-SX1280IMLTRT, Arrow Part Number=SX1280IMLTRT, Arrow Price/Stock=https://www.arrow.com/en/products/sx1280imltrt/semtech?utm_currency=USD&region=nac, Datasheet Link=https://datasheet.datasheetarchive.com/originals/distributors/DKDS-37/728740.pdf, Height=1mm, Manufacturer_Part_Number=SX1280IMLTRT, Mouser Price/Stock=https://www.mouser.co.uk/ProductDetail/Semtech/SX1280IMLTRT?qs=5aG0NVq1C4xuoq8G6ZzdxQ%3D%3D
C1 C2: library part CMP-03020-018448-1, "C0603 18 pF C0G 30ppm/°C 1.00% 50 V", Capacitance="18 pF", Manufacturer=KEMET, Manufacturer Part Number=C0603C180F5GACAUTO, Package=C0603C-CF, Temperature="-55°C to +125°C", Temperature Characteristic=C0G, Temperature Coefficient=30ppm/°C, Temperature Range High=+125°C, Temperature Range Low=-55°C, Tolerance=0.01, Voltage Rating="50 V", Automotive=Yes, Automotive Grade="Grade 1", Category=Cap, ComponentLink2Description=Datasheet, ComponentLink2URL=https://api.kemet.com/component-edge/download/datasheet/C0603C100J5GACAUTO.pdf, Device Class L1="Passive Components", Device Class L2=Capacitors, Device Class L3="Ceramic Capacitors", Height=0.87mm, Lead Free=Yes, Material=Ceramic, Octopart=https://octopart.com/c0603c180f5gacauto-kemet-91893831, RoHS=TRUE
C3 C4 C5 C6 C7 C8 C9 C10 C22 C25 C27 C29 C32 C33 C36 C38 C41 C43 C45 C47 C48 C49 C53 C61: library part CMP-2006-01140-1, Manufacturer=Vitramon, Part Number=VJ0603Y104MXXAC
C11 C12 C13 C14 C15 C16 C17 C18 C23 C26 C28 C30 C31 C40 C42 C46 C50 C51 C52 C54 C62: library part CMP-2006-04534-1, Manufacturer="AVX Interconnect / Elco", Part Number=0603YD105MAT2A
C19: library part CMP-03422-001038-2, "CAP CER 4.7UF 6.3V X7R 0603", Case Code (Imperial)=0603, Case Code (Metric)=1608, Max Operating Temperature=125°C, Min Operating Temperature=-55°C, Tolerance=20%, Voltage Rating=6.3V, Capacitance=4.7uF, Case/Package=0603, Mount="Surface Mount", Packaging="Cut Tape", RoHS Compliant=Yes
C21 C24: library part CMP-03422-000187-1, "CC0603 2.2 uF X5R 10.00% 16 V", Capacitance="2.2 uF", Manufacturer=YAGEO, Manufacturer Part Number=CC0603KPX5R7BB225, Package=CC0603-DA, Temperature="-55°C to +125°C", Temperature Characteristic=X5R, Temperature Coefficient=15%, Temperature Range High=+125°C, Temperature Range Low=-55°C, Tolerance=0.1, Voltage="16 V", Automotive=No, Category=Cap, ComponentLink2Description=Datasheet, ComponentLink2URL=http://www.yageo.com/documents/recent/UPY-GPHC_X7R_6.3V-to-50V_18.pdf, Device Class L1="Passive Components", Device Class L2=Capacitors, Device Class L3="Ceramic Capacitors", Footprint Url=http://www.yageo.com/exep/pages/download/literatures/UPY-C_GEN_24.pdf, Height=0.9mm, Lead Free=Yes, Material=Ceramic, Octopart=https://octopart.com/cc0603kpx5r7bb225-yageo-91091799, RoHS=TRUE, Voltage Rating="16 V"
C34 C35: library part CMP-06035-063651-1, "Multilayer Ceramic Capacitor 22uF 20% 16V X5R 0603 Paper T/R"
C37: library part CMP-06035-062385-2, "CAP CER 10UF 25V X5R 0603", Case Code (Imperial)=0603, Case Code (Metric)=1608, Dielectric=X5R, Max Operating Temperature=85°C, Min Operating Temperature=-55°C, Tolerance=20%, Voltage=25V, Capacitance=10uF, Case/Package=0603, Depth=0.8mm, Height=1mm, Length=0.063inch, Mount="Surface Mount", Packaging="Cut Tape", REACH SVHC="No SVHC", RoHS Compliant=Yes, Thickness=0.047inch, Voltage Rating=25V, Voltage Rating (DC)=25V, Width=0.031inch
C39: library part CMP-2006-01182-1, Manufacturer=Vitramon, Part Number=VJ0603A101FXAAC
C44: library part CMP-08246-003816-1, "Multilayer Ceramic Capacitors 2.2uF ±10% 6.3V X7R SMD 0805, type: CGB4B3X7R0J225K055AB", Case Code (Imperial)=0805, Case Code (Metric)=2012, Max Operating Temperature=125°C, Min Operating Temperature=-55°C, Package Quantity=4000, Tolerance=10%, Voltage Rating=6.3V, Capacitance=2.2uF, Case/Package=0805, Length=0.079inch, Mount="Surface Mount", Packaging="Tape and Reel", RoHS Compliant=Yes, Series=CGB, Thickness=0.022inch, Width=0.049inch
C55: library part CMP-1035-00001-1, "CAP 0.5pF 10V ±0.1pF 0603 (1608 Metric) Thickness 1mm SMD", Case-EIA=0603, Case-Metric=1608, Rated Voltage="10 V", Tolerance=Â±0.1pF, Max Thickness="1 mm", Technology=SMT
C56: library part CMP-2006-01145-1, Manufacturer=Vitramon, Part Number=VJ0603A101KXCAC
C57 C58: library part CMP-2006-04009-1, Manufacturer="AVX Interconnect / Elco", Part Number=06031A1R2CAT2A
C59: library part CMP-06035-009191-1, "Ceramic Capacitor for Automotive 0.8pF  ±0.1pF 100VDC C0G 0603 Paper T/R"
C60 C65: library part CMP-2006-01201-1, Manufacturer=Vitramon, Part Number=VJ0603Y103JXXAC
C63 C64: library part CMP-2006-04052-1, Manufacturer="AVX Interconnect / Elco", Part Number=06031A5R0CAT2A
D1: library part CMP-02539-000066-1, "DIODE SCHOTTKY 40V 3A DO214AB", Average Rectified Current=3A, Case/Package=SMC, Forward Voltage=500mV, Max Operating Temperature=125°C, Max Repetitive Reverse Voltage (Vrrm)=40V, Max Reverse Current=500uA, Max Surge Current=100A, Min Operating Temperature=-55°C, Package Quantity=3500, Element Configuration=Single, Forward Current=3A, Max Reverse Leakage Current=500uA, Max Reverse Voltage (DC)=40V, Mount="Surface Mount", Number of Pins=2, Packaging="Tape and Reel", Peak Non-Repetitive Surge Current=100A, Radiation Hardening=No, RoHS Compliant=Yes, Series=-
IC1: "Integrated Circuit", Manufacturer_Name=STMicroelectronics, Mouser Part Number=511-STM32F745VGT6, Arrow Part Number=STM32F745VGT6, Arrow Price/Stock=https://www.arrow.com/en/products/stm32f745vgt6/stmicroelectronics, Datasheet Link=https://www.st.com/resource/en/datasheet/stm32f745ie.pdf, Height=1.6mm, Manufacturer_Part_Number=STM32F745VGT6, Mouser Price/Stock=https://www.mouser.co.uk/ProductDetail/STMicroelectronics/STM32F745VGT6?qs=k5OWtXsTJapN7FnaCvUsAA%3D%3D
IC2: "Integrated Circuit", Manufacturer_Name=BOSCH, Mouser Part Number=262-BMP384, Arrow Part Number=BMP384, Arrow Price/Stock=https://www.arrow.com/en/products/bmp384/bosch-sensortec?utm_currency=USD&region=nac, Datasheet Link=https://www.mouser.in/datasheet/2/783/bst_bmp384_ds003-1954011.pdf, Height=1mm, Manufacturer_Part_Number=BMP384, Mouser Price/Stock=https://www.mouser.co.uk/ProductDetail/Bosch-Sensortec/BMP384?qs=IS%252B4QmGtzzqB3KCclqIEVQ%3D%3D
IC3: "Integrated Circuit", Manufacturer_Name="Diodes Incorporated", Mouser Part Number=621-AP63201WU-7, Arrow Part Number=AP63201WU-7, Arrow Price/Stock=https://www.arrow.com/en/products/ap63201wu-7/diodes-incorporated?utm_currency=USD&region=nac, Datasheet Link=https://www.diodes.com//assets/Datasheets/AP63200-AP63201-AP63203-AP63205.pdf, Height=1mm, Manufacturer_Part_Number=AP63201WU-7, Mouser Price/Stock=https://www.mouser.co.uk/ProductDetail/Diodes-Incorporated/AP63201WU-7?qs=u16ybLDytRaVD%252BU3eG30NA%3D%3D
IC4: "Integrated Circuit", Manufacturer_Name="Diodes Incorporated", Mouser Part Number=621-AP2112K-1.8TRG1, Arrow Part Number=AP2112K-1.8TRG1, Arrow Price/Stock=https://www.arrow.com/en/products/ap2112k-1.8trg1/diodes-incorporated?utm_currency=USD&region=nac, Datasheet Link=https://www.diodes.com//assets/Datasheets/AP2112.pdf, Height=1.4mm, Manufacturer_Part_Number=AP2112K-1.8TRG1, Mouser Price/Stock=https://www.mouser.co.uk/ProductDetail/Diodes-Incorporated/AP2112K-1.8TRG1?qs=x6A8l6qLYDBx1xhw8AX2cw%3D%3D
IC5: "Integrated Circuit", Manufacturer_Name=BOSCH, Mouser Part Number=262-BMM350, Arrow Part Number=BMM350, Arrow Price/Stock=https://www.arrow.com/en/products/bmm350/bosch-sensortec?utm_currency=USD&region=nac, Datasheet Link=https://www.bosch-sensortec.com/media/boschsensortec/downloads/datasheets/bst-bmm350-ds001.pdf, Height=0.54mm, Manufacturer_Part_Number=BMM350, Mouser Price/Stock=https://www.mouser.co.uk/ProductDetail/Bosch-Sensortec/BMM350?qs=amGC7iS6iy9v98dnmxozLQ%3D%3D
IC6: "Integrated Circuit", Manufacturer_Name=u-blox, Datasheet Link=https://content.u-blox.com/sites/default/files/documents/DAN-F10N_DataSheet_UBXDOC-963802114-13074.pdf, Height=12.4mm, Manufacturer_Part_Number=DAN-F10N-00B
J5: library part CMP-03356-000002-1, "MICRO SD PUSH PUSH LOW PROFILE T", Current Rating=0.5A, Manufacturer="TE Connectivity", Package=0, Temperature="-30°C to +85°C", Temperature Range High=+85°C, Temperature Range Low=-30°C, Voltage Rating=10V, Automotive=No, Category=Conn, ComponentLink2Description=Datasheet, ComponentLink2URL=https://www.te.com/commerce/DocumentDelivery/DDEController?Action=showdoc&DocId=Specification+Or+Standard%7F108-78951%7FA%7Fpdf%7FEnglish%7FENG_SS_108-78951_A.pdf%7F2201778-1, Conn Orientation="Right Angle", Contact Material=Gold,Nickel, Device Class L1=Connectors, Device Class L2="Memory Connectors", Device Class L3=unset, Digikey Description="MICRO SD PUSH PUSH LOW PROFILE T", Footprint Url=https://www.te.com/commerce/DocumentDelivery/DDEController?Action=showdoc&DocId=Customer+Drawing%7F2201778%7FC%7Fpdf%7FEnglish%7FENG_CD_2201778_C.pdf%7F2201778-1, Height=1.75mm, Is Female=yes, Lead Free=Yes, Manufacturer Part Number=2201778-1, Memory Type=SDRAM, Mouser Description="CONNECTOR, MICROSD, PUSH PUSH - REEL; Connector Type: Micro SD; Contact Material:", Number Of Contacts=8, Octopart=https://octopart.com/2201778-1-te+connectivity-46448999, Pitch=1.1mm, RoHS=TRUE
J6: library part CMP-0029-00003-2, "CONN U.FL RCPT STR 50 OHM SMD", Case/Package=SMD/SMT, Dielectric Material=Polymer, Frequency=6GHz, Housing Color=Beige, Max Operating Temperature=90°C, Min Operating Temperature=-40°C, Package Quantity=1, Body Material=Bronze, Body Plating=Silver, Connector Type=Coaxial, Contact Material=Brass, Contact Plating=Gold, Depth=3.1mm, Fastening Type=Snap, Impedance=50R, Lead Free="Lead Free", Length=3mm, Max Frequency=6GHz, Mount="Surface Mount", Orientation=Vertical, Packaging="Tape and Reel", Plating=Silver, Radiation Hardening=No, Termination=Solder
L1: library part CMP-08253-000236-1, "Shielded Multilayer Inductor 6.8uH ±20% 300mA 962mΩ SMD 0603", RoHS Compliant=Yes
L2: library part CMP-06042-004686-1, "Film type RF Inductor 2.5nH ±0.1nH 500mA 0.2Ω 0201 (0603)", Case Code (Imperial)=0201, Case Code (Metric)=0603, Current Rating=500mA, DC Resistance (DCR)=200mR, Max Operating Temperature=125°C, Min Operating Temperature=-55°C, Package Quantity=15000, Resistor Type="Thin Film", Self Resonant Frequency=10GHz, Test Frequency=500MHz, Case/Package=0201, Core Material=Non-Magnetic, Height=0.3mm, Height - Seated (Max)=0.013inch, Inductance=2.5nH, Lead Free="Lead Free", Length=0.024inch, Max DC Current=500mA, Mount="Surface Mount", Packaging="Tape and Reel", Q Factor=14, Shielding=Unshielded, Termination=SMD/SMT, Width=0.012inch
L3: library part CMP-06042-001485-1, "Wire Wound RF Inductor 3nH ±0.2nH 670mA 0.17Ω 0603 (1608)", Case Code (Imperial)=0603, Case Code (Metric)=1608, Current Rating=670mA, DC Resistance (DCR)=170mR, Max Operating Temperature=125°C, Min Operating Temperature=-55°C, Package Quantity=4000, Resistor Type=Wirewound, Self Resonant Frequency=15GHz, Test Frequency=100MHz, Case/Package=0603, Core Material=Non-Magnetic, Height=0.9mm, Height - Seated (Max)=0.039inch, Inductance=3nH, Length=0.065inch, Max DC Current=670mA, Mount="Surface Mount", Packaging="Tape and Reel", Q Factor=13, Shielding=Unshielded, Termination=SMD/SMT, Weight=7.1E-05oz, Width=0.99mm
R1 R2: library part CMP-02407-002367-1, "RES SMD 100 OHM 1% 1/8W 0603", Case/Package=0603, Max Operating Temperature=125°C, Max Power Dissipation=100mW, Min Operating Temperature=-55°C, Package Quantity=1000, Resistance=10kR, Temperature Coefficient=15ppm/°C, Tolerance=0.1%, Composition="Thin Film", Height=0.022inch, Length=0.061inch, Number of Terminations=2, Packaging="Tape and Reel", Width=0.033inch
R3: library part CMP-03412-027023-2, "RES 182KΩ 1.00% 0.1W 0603", Case/Package=0603, Max Operating Temperature=155°C, Max Power Dissipation=100mW, Min Operating Temperature=-55°C, Resistance=182kR, Resistor Type="Thick Film", Temperature Coefficient=100ppm/°C, Tolerance=1%, Features="Moisture Resistant", Height=0.022inch, Length=0.063inch, Number of Terminations=2, Packaging="Tape and Reel", RoHS Compliant=Yes, Series=AC, Width=0.031inch
R4: library part CMP-250906-245084-1, "RES Thin Film,  28.7kΩ, 0.1%, 0.1W, 25ppm/°C, 0603"
R5: library part CMP-02407-011340-1, "RES Thick Film, 2.8kΩ, 1%, 0.33W, 100ppm/°C, 0603", Case Code (Imperial)=0603, Case Code (Metric)=1608, Max Operating Temperature=155°C, Max Power Dissipation=250mW, Min Operating Temperature=-55°C, Package Quantity=10, Resistance=2.8kR, Resistor Type="Thick Film", Temperature Coefficient=100ppm/°C, Tolerance=1%, Case/Package=0603, Contact Plating=Tin, Features="Automotive AEC-Q200", Height=0.022inch, Lead Free="Lead Free", Length=0.063inch, Mount="Surface Mount", Number of Terminations=2, Packaging="Tape and Reel", Power Rating=250mW, Radiation Hardening=No, RoHS Compliant=Yes, Series=CRCW-HP, Width=0.033inch
R6: library part CMP-26527-001234-1, "62kΩ ±5% 0.1W 0603 Thick Film Chip Resistor AEC-Q200 compliant", Case Code (Imperial)=0603, Case Code (Metric)=1608, Max Operating Temperature=155°C, Max Power Dissipation=100mW, Min Operating Temperature=-55°C, Package Quantity=5000, Resistance=62kR, Resistor Type="Thick Film", Temperature Coefficient=200ppm/°C, Tolerance=5%, Case/Package=0603, Contact Plating=Tin, Features="Automotive AEC-Q200", Height=0.022inch, Lead Free="Lead Free", Length=0.061inch, Mount="Surface Mount", Number of Terminations=2, Packaging="Tape and Reel", Power Rating=100mW, Radiation Hardening=No, RoHS Compliant=Yes, Series=RMCF, Size Code=0603, Width=0.031inch
R7 R8 R9 R10 R11 R12 R13: library part CMP-03412-006483-2, "RES 4.7KΩ 1.00% 0.1W 0603", Case/Package=0603, Resistance=4.7kR, Tolerance=1%, RoHS Compliant=Yes
SW1: library part CMP-08834-000055-1, "SWITCH TACTILE SPST-NO 0.05A 24V", Max Operating Temperature=70°C, Min Operating Temperature=-25°C, Operating Force=230gf, Ratings=IP67, Actuator Type=Standard, Illumination Type=Non-Illuminated, Mechanical Life=1000000Cycles, Mount="Through Hole", Packaging=Bulk, RoHS Compliant=Yes, Switch Function=Off-Mom, Switch Travel=0.25mm, Termination="PC Pin", Throw Configuration=SPST
U1: "Undefined or Miscellaneous", Manufacturer_Name=BOSCH, Arrow Part Number=BMI330, Arrow Price/Stock=https://www.arrow.com/en/products/bmi330/bosch-sensortec?utm_currency=USD&region=nac, Datasheet Link=https://www.digikey.ph/en/products/detail/bosch-sensortec/BMI330/26795906?msockid=3bdc366bbe0663d83c1223c0bf3662a6, Height=0.87mm, Manufacturer_Part_Number=BMI330
Y1: library part CMP-27762-003067-1, "Crystal 16MHz ±20ppm 18pF SMD-4 3.2mm x 2.5mm                      ABM8-16.000MHZ-B2-T3", Case/Package=SMD/SMT, ESR (Equivalent Series Resistance)=70R, Frequency Stability=50ppm, Frequency Tolerance=20ppm, Load Capacitance=18pF, Max Operating Temperature=70°C, Min Operating Temperature=-20°C, Frequency=16MHz, Height=0.031inch, Length=0.126inch, Mount="Surface Mount", Packaging="Tape and Reel", RoHS Compliant=Yes, Series=ABM8, Width=0.098inch
Y2: "Crystal or Oscillator", Manufacturer_Name=ABRACON, Mouser Part Number=815-13W52-5-B2GT, Arrow Part Number=ABM13W-52.0000MHZ-5-B2G-T5, Arrow Price/Stock=https://www.arrow.com/en/products/abm13w-52.0000mhz-5-b2g-t5/abracon, Datasheet Link=https://abracon.com/datasheets/ABM13W.pdf, Height=0.33mm, Manufacturer_Part_Number=ABM13W-52.0000MHZ-5-B2G-T5, Mouser Price/Stock=https://www.mouser.co.uk/ProductDetail/ABRACON/ABM13W-520000MHZ-5-B2G-T5?qs=qSfuJ%252Bfl%2Fd5s5ep7evyC%2Fg%3D%3D

## Free pads (board coordinates)
  round 4.5 hole 3 unplated: "MNT PCB"(-43.1,-10) "MNT PCB"(-43.1,-41) "MNT PCB"(-10.1,-41) "MNT PCB"(-10.1,-10)

## Via types
v1: diameter 0.7, hole 0.3, Top Layer to Bottom Layer, 34 vias
v2: diameter 0.9, hole 0.5, Top Layer to Bottom Layer, 26 vias
v3: diameter 0.6, hole 0.2, Top Layer to Bottom Layer, 13 vias
v4: diameter 1.27, hole 0.711, Top Layer to Bottom Layer, 9 vias
v5: diameter 1, hole 0.6, Top Layer to Bottom Layer, 9 vias
v6: diameter 3, hole 1, Top Layer to Bottom Layer, 8 vias
v7: diameter 0.5, hole 0.35, Top Layer to Bottom Layer, 2 vias
v8: diameter 1, hole 0.5, Top Layer to Bottom Layer, 2 vias

## Nets (pads, with @x,y where several pads share a name; then routed paths per layer and width w, separated by ;. In a path a pad name is that pad's centre, name@x,y a point inside that pad or via, vN(x,y) a via of type N, cw(c..) or ccw(c..) an arc to the next point about the centre after c; other vN are vias at no path point)
+1.8: C42.2 C43.1 IC5.C1 J14.2 | length 20.4
  Top Layer w0.254: IC5.C1@-27.5,-4.6 -27.5,-4.2 -26,-2.7 -25.637,-2.7 -25.2,-2.263 -25.158,-2.263
  Top Layer w0.5: -25.158,-2.263 -25.158,-1.458 -24.7,-1 -16.3,-1 -14.9,-2.4 -14.7,-2.4 J14.2@-14.425,-2.4 -14.425,-3.275 -13.2,-4.5 C43.1@-13.2,-4.8
  Top Layer w1: C43.1@-12.9,-5 -11.35,-5 -11.325,-5.025 -11.3,-5.025 C42.2@-11.3,-5.05
+3.3: "\".15" C3.2 C4.2 C5.2 C6.2 C7.2 C8.2 C9.2 C10.2 C11.2 C12.2 C13.2 C14.2 C15.2 C16.2 C17.2 C18.2 C19.1 C22.2 C23.2 C25.2 C26.2 C27.2 C28.2 C29.2 C30.2 C31.2 C32.2 C34.1 C35.1 C36.2 C39.2 C40.2 C41.1 C45.2 C46.2 C47.2 C48.2 C49.2 C50.2 C51.2 C52.2 C53.2 C54.2 C61.2 C62.2 IC1.6 IC1.11 IC1.20 IC1.21 IC1.27 IC1.50 IC1.75 IC1.100 IC2.1 IC2.10 IC4.1 IC4.3 IC5.B3 IC6.16 IC6.52 IC6.53 IC6.55 J1.10 J5.4 J13.2 R1.2 R3.2 R7.2 R8.2 R9.2 R10.2 R11.2 R12.2 R13.1 SW1.1 U1.5 U1.8 | length 213.8
  Top Layer w0.254: -40.1,-13.5 IC2.1@-39.4,-13.5 ; IC2.10@-39.137,-12.996 -39.137,-12.1 ; C6.2@-37,-31.75 C6.2@-36.767,-31.518 ; C5.2@-37,-21.275 -36.875,-21.4 -36.3,-21.4 -34.25,-23.45 ; C4.2@-37,-19.25 -36.05,-19.25 -34.3,-21 IC1.6@-31.838,-21 ; v5(-35.345,-23.738) -35.32,-23.714 -34.514,-23.714 -34.3,-23.5 ; v5(-34.9,-28.3) v5@-34.698,-28.3 ; -34.2,-23.5 IC1.11@-31.838,-23.5 ; IC1.21@-31.838,-28.5 -34.498,-28.5 v5@-34.698,-28.3 ; IC1.20@-31.838,-28 -34.398,-28 v5@-34.698,-28.3 ; C3.2@-31.2,-14.725 -31.125,-14.725 -30.777,-15.073 -30.777,-15.148 -30.1,-15.825 IC1.100@-30.1,-16.762 ; C8.2@-29.876,-34.325 -29.6,-34.05 IC1.27@-29.6,-32.238 ; C45.2@-29.749,-5.949 -27.249,-5.949 -27.1,-5.8 IC5.B3@-27.1,-5.4 ; -18.1,-34 IC1.50@-18.1,-32.238 ; IC1.75@-16.362,-18.5 -14.4,-18.5 -13.5,-17.6 ; -12.75,-35.05 -12.773,-35.027 -13.27,-35.027 -13.7,-34.597 -13.7,-33 -12.3,-31.6 -11.5,-31.6 -11,-31.1 C61.2@-11,-30.5
  Top Layer w0.5: C27.2@-41.75,-13.925 -41.67,-13.845 -40.845,-13.845 -40.5,-13.5 -40.1,-13.5 ; v5@-41.35,-12.55 v5(-41.2,-12.4) ; C25.2@-39.3,-10.9 -39.237,-10.9 -39.137,-11 -39.137,-12.1 ; v1(-34.7,-6.7) -33.75,-5.75 C46.2@-31.6,-5.75 ; v5@-33.2,-10.6 -33.196,-10.596 -33.069,-10.596 -32.788,-10.877 R8.2@-30.9,-10.877 ; J13.2@-24.5,-40.7 -23.4,-40.7 -22.75,-40.05 -22.7,-40 ; -21.85,-40.1 -20.45,-38.7 -15.8,-38.7 -15.2,-38.1 -15.2,-36.3 -15.671,-35.829 v4@-16.471,-35.829 ; v2(-21.3,-3.225) -21.3,-2.5 C53.2@-20.9,-2.1 ; -18.1,-34 -18.1,-34.3 v4(-16.6,-35.8) ; v2@-14.8,-17.6 C10.2@-12.924,-17.6 ; IC4.1@-8.55,-3.45 -8.275,-3.45 -7.825,-3.9 C41.1@-6.925,-3.9 ; IC4.3@-8.55,-1.55 -5.95,-1.55 -5.6,-1.9 -5.6,-3.8 -5.7,-3.9 C41.1@-6.475,-3.9
  Top Layer w0.51: C16.2@-29.85,-36.1 -29.605,-36.345 -28.955,-36.345 -28.7,-36.6 -28.275,-36.6 -27.252,-37.623 R3.2@-27.225,-37.623
  Top Layer w1: C28.2@-43.6,-14.05 C27.2@-42,-14.05 ; C27.2@-41.825,-14 C27.2@-41.8,-13.975 -41.775,-13.975 -41.75,-13.95 -41.75,-13.925 -41.75,-12.85 v5@-41.4,-12.5 ; C25.2@-39.325,-10.7 -39.325,-8.95 C26.2@-39.275,-8.9 ; v5@-39.3,-7.6 -39.275,-7.625 C26.2@-39.275,-8.9 ; C26.2@-39.25,-8.9 C26.2@-39.275,-8.9 ; C13.2@-38.9,-21.25 -38.9,-21.275 C5.2@-37,-21.275 ; C12.2@-38.9,-19.25 C4.2@-37,-19.25 ; C14.2@-38.85,-31.725 -38.85,-31.738 -37.012,-31.738 C6.2@-37,-31.75 C7.2@-37,-30 ; C15.2@-38.8,-29.85 -38.8,-29.837 C7.2@-37.1,-29.837 ; C7.2@-37,-29.825 -36.975,-29.8 -36.4,-29.8 v5(-34.9,-28.3) ; v5(-34.3,-14.7) -34.275,-14.725 C11.2@-33.2,-14.725 ; C11.2@-33.2,-14.7 C3.2@-31.225,-14.7 ; C46.2@-31.6,-5.8 -31.525,-5.725 C45.2@-29.8,-5.725 ; R8.2@-30.894,-10.877 R7.2@-28.8,-10.877 ; C8.2@-29.876,-34.325 -29.85,-34.351 C16.2@-29.85,-36.1 ; C36.2@-27.4,-42.7 -27.399,-42.699 C35.1@-25.2,-42.699 ; R3.2@-27.225,-37.623 -25.977,-37.623 C39.2@-25.825,-37.775 -25.025,-37.775 -22.75,-40.05 -22.7,-40.1 ; C35.1@-25.199,-42.699 C34.1@-23,-42.699 -23,-40.4 -22.7,-40.1 ; C54.2@-22.1,-2.1 C53.2@-20.525,-2.1 ; -21.85,-40.1 -22.7,-40.1 ; C9.2@-19.9,-35.9 -18.25,-35.9 -18.225,-35.875 -18.2,-35.875 C17.2@-18.2,-35.85 -18.2,-35.825 v4@-16.6,-35.825 ; C10.2@-12.9,-17.5 C19.1@-12.9,-14.1 ; C62.2@-10.875,-28.725 -10.825,-28.775 C61.2@-10.825,-30.5 ; C62.2@-10.85,-28.7 -10.825,-28.7 -10.825,-27.025 v4(-10.8,-27) ; C40.2@-8.7,-5.05 -8.7,-5.025 -7.625,-5.025 -6.9,-4.3 -6.1,-5.1 v2@-6.1,-5.5
  PWR w0.5: -21.3,-4.6 v2(-21.3,-3.225)
  Bottom Layer w0.254: -35.786,-23.977 -35.509,-23.7 v5@-35.4,-23.7 ; U1.8@-26.65,-26.263 -26.65,-26.55 -26.2,-27 v1@-25.5,-27 ; U1.5@-26.487,-24.6 -25.9,-24.6 -24.925,-23.625 C29.2@-24.1,-23.625 ; R12.2@-25.7,-20.1 R12.2@-25.7,-19.977
  Bottom Layer w0.5: C50.2@-39.75,-35.499 -39.632,-35.617 -38.783,-35.617 -38.151,-36.249 IC6.52@-36.75,-36.249 ; C47.2@-39.75,-33.799 -39.55,-33.999 -38.801,-33.999 -37.801,-34.999 -36.9,-34.999 IC6.53@-36.75,-35.149 ; C48.2@-39.6,-30.349 -39.054,-30.895 -39.016,-30.895 -38.3,-31.611 -38.3,-32.4 -37.901,-32.799 -36.9,-32.799 IC6.55@-36.75,-32.949 ; C49.2@-36.65,-24.4 -36.65,-24.325 -36.425,-24.1 -35.909,-24.1 -35.786,-23.977 ; -34.925,-6.375 -34.6,-6.7 v1(-34.7,-6.7) ; v1@-34.608,-6.7 -34.635,-6.727 -34.635,-6.765 -33.6,-7.8 -33.5,-7.8 -33.2,-8.1 -31.1,-8.1 -30.525,-7.525 R1.2@-30.525,-5.8 ; R12.2@-25.7,-20.1 -25.572,-20.228 -25.572,-22.248 -25.553,-22.267 ; -25.6,-22.3 -25.6,-22.9 -25.1,-23.4 -24.325,-23.4 C29.2@-24.1,-23.625 ; v1(-25.4,-27) -25.362,-26.962 -25.362,-26.262 -24.8,-25.7 C32.2@-24.5,-25.7 ; J5.4@-21.8,-4.6 -21.65,-4.45 -21.65,-3.695 -21.3,-3.345 v2(-21.3,-3.225) ; IC6.16@-18.5,-32.949 -18.494,-32.955 -17.645,-32.955 -16.747,-33.853 -16.747,-35.653 v4(-16.6,-35.8)
  Bottom Layer w1: v4(-42.7,-27.037) -40.361,-27.037 -39.775,-27.623 -39.775,-28.299 C52.2@-39.75,-28.299 ; C50.2@-39.75,-35.499 -39.75,-33.799 C51.2@-39.75,-31.899 C52.2@-39.75,-28.45 ; SW1.1@-39.1,-1.4 -38.875,-1.625 -38.875,-2.425 -34.925,-6.375 ; v1@-27.2,-20 -27.177,-19.977 R12.2@-25.7,-19.977 -23.606,-19.977 -23.6,-19.983 R13.1@-23.6,-20 ; C32.2@-24.1,-25.575 -22.3,-25.575 C31.2@-22.3,-25.55 ; C29.2@-24.1,-23.625 -22.3,-23.625 C30.2@-22.3,-23.65 ; R9.2@-21.5,-19.977 R10.2@-19.406,-19.977 ; R10.2@-19.4,-19.977 R11.2@-17.306,-19.977 ; R11.2@-17.3,-19.977 -17.3,-19.953 -17.294,-19.947 -16.147,-19.947 -14.9,-18.7 v2(-14.9,-17.6) ; v2@-8.8,-19.3 C22.2@-6.05,-19.3 ; C22.2@-5.7,-19.3 -5,-19.3 -4.1,-18.4 -2.1,-18.4 J1.10@-2,-18.3
  other v1: -27.3,-20 -35.4,-19.8
  other v2: -8.9,-19.3 -6.045,-5.638
  other v5: -33.3,-10.5 -39.247,-7.501
Aut/Cont: IC1.2 R1.1 S1.2 | length 19
  Top Layer w0.254: v2(-31.9,-7.1) -35.1,-10.3 -35.1,-15.2 -33.7,-16.6 -33.7,-18.3 -33,-19 IC1.2@-31.838,-19
  Bottom Layer w0.5: v2(-31.9,-7.1) -31.887,-7.087 -31.887,-5.812 R1.1@-31.875,-5.8 -31.862,-5.787 -31.862,-3.438 S1.2@-31.9,-3.4 ; S1.2@-31.862,-3.363 S1.2@-31.85,-3.35